# Altium PCB PSC_LED_KEYBOARD.PcbDoc (part 2 of 2)
Units mm, origin at the board's own origin, x right, y up, seen from the top; angles counter-clockwise.
Board outline 100 x 100 mm, 2 copper layers (Top Layer, Bottom Layer); 100 components, 28 nets, 284 pads, 1428 vias.
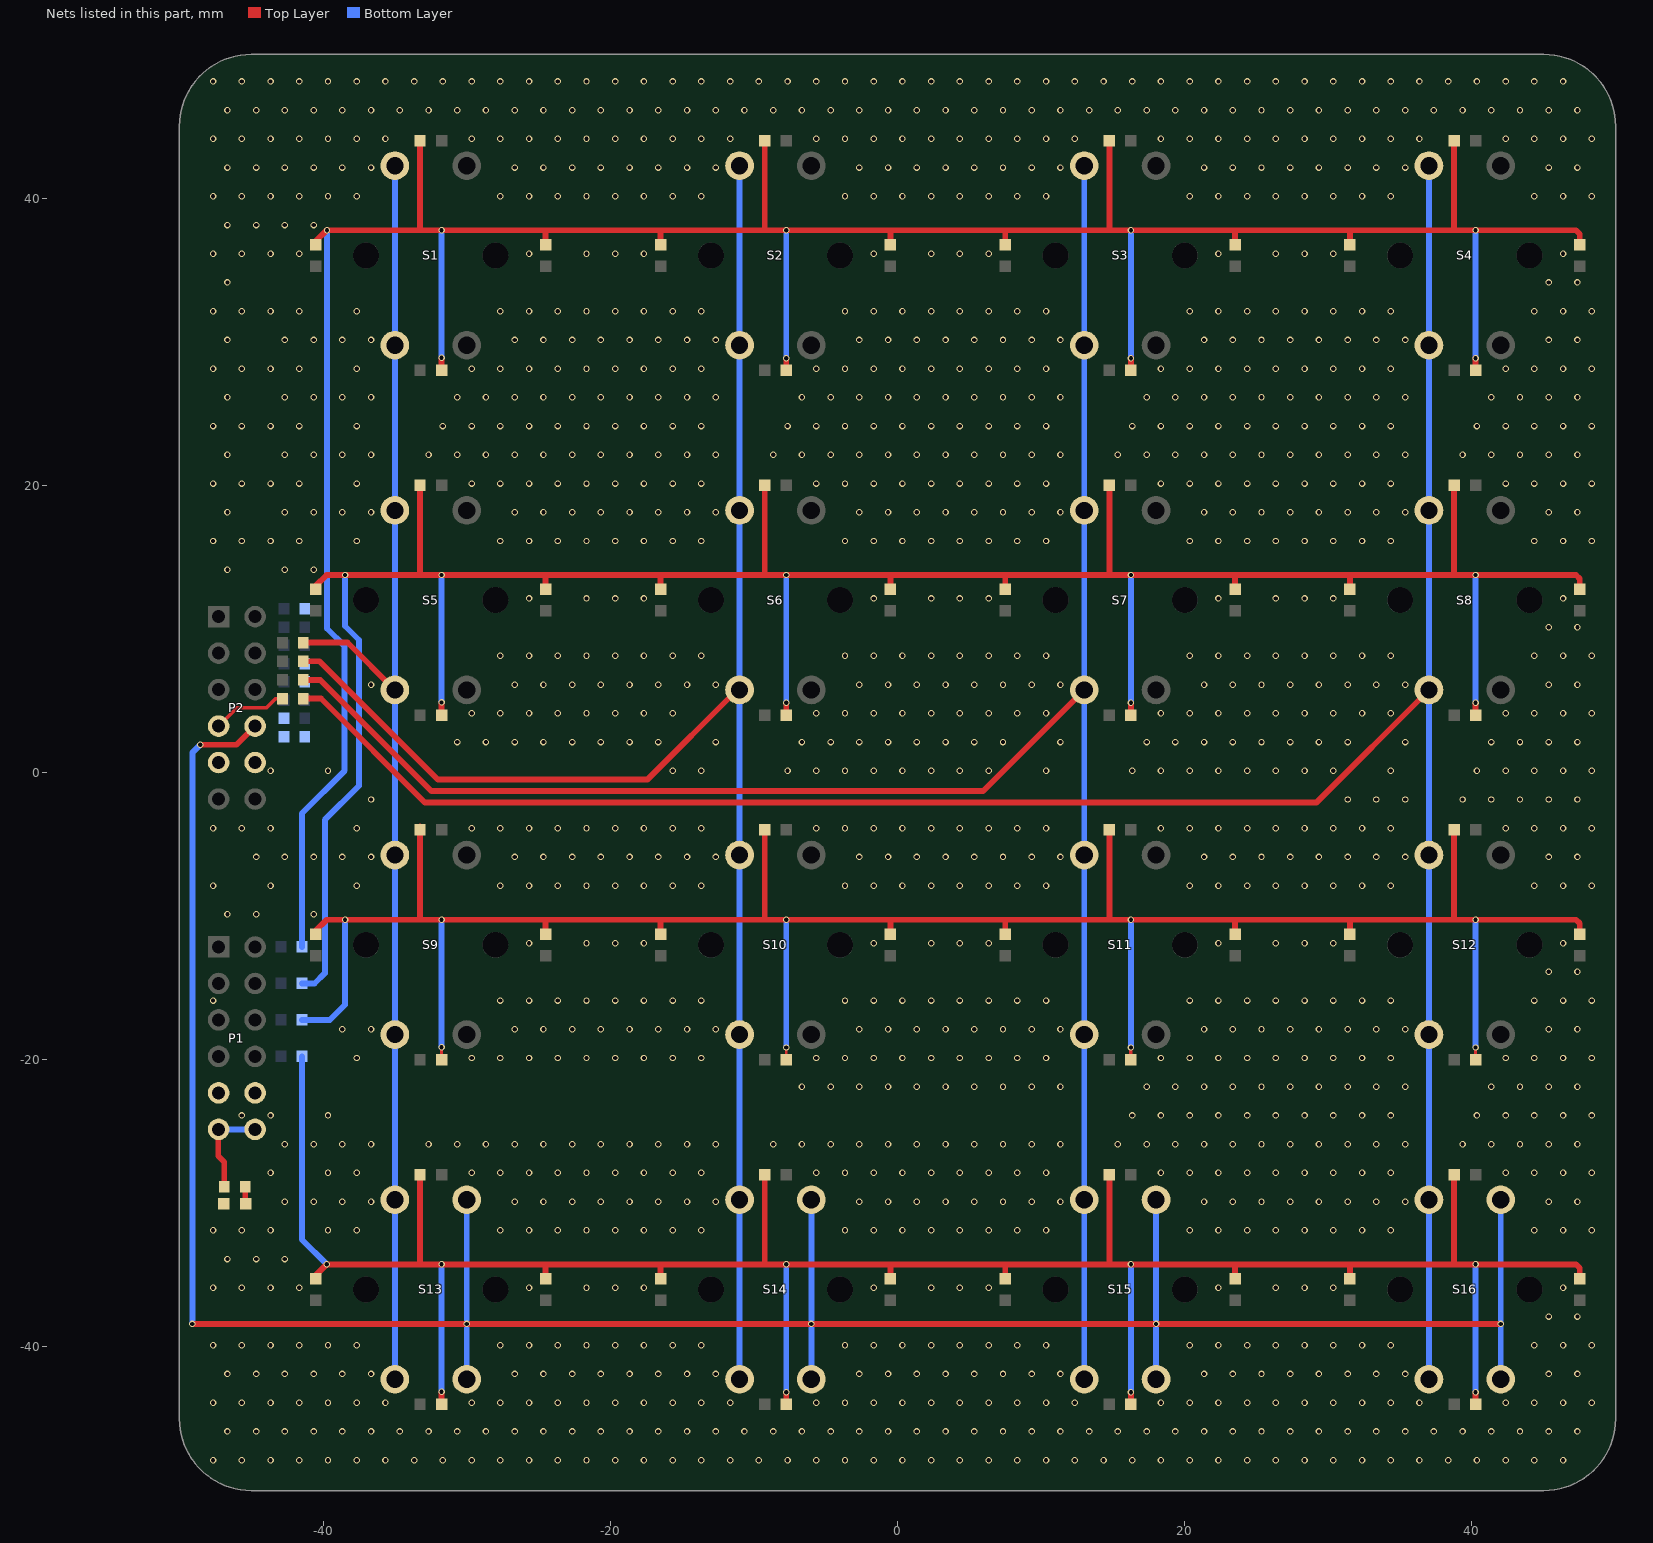
[diagram p2: the nets of this part, all layers, seen from the top]

## Via types
v1: diameter 0.45, hole 0.3, Top Layer to Bottom Layer, tented both sides, 1428 vias

## Nets (pads, with @x,y where several pads share a name; then routed paths per layer and width w, separated by ;. In a path a pad name is that pad's centre, name@x,y a point inside that pad or via, vN(x,y) a via of type N, cw(c..) or ccw(c..) an arc to the next point about the centre after c; other vN are vias at no path point) (continued)
GND: D5.1 P1.9 P1.10 P2.9 P2.10 R13.1 R14.1 R15.1 R16.1
  other v1: -47.657,-47.882 -45.657,-47.882 -43.657,-47.882 -41.657,-47.882 -39.657,-47.882 -37.657,-47.882 -35.657,-47.882 -33.657,-47.882 -31.657,-47.882 -29.657,-47.882 -27.657,-47.882 -25.657,-47.882 -23.657,-47.882 -21.657,-47.882 -19.657,-47.882 -17.657,-47.882 -15.657,-47.882 -13.657,-47.882 -11.657,-47.882 -9.657,-47.882 -7.657,-47.882 -5.657,-47.882 -3.657,-47.882 -1.657,-47.882 0.343,-47.882 2.343,-47.882 4.343,-47.882 6.343,-47.882 8.343,-47.882 10.343,-47.882 12.343,-47.882 14.343,-47.882 16.343,-47.882 18.343,-47.882 20.343,-47.882 22.343,-47.882 24.343,-47.882 26.343,-47.882 28.343,-47.882 30.343,-47.882 32.343,-47.882 34.343,-47.882 36.343,-47.882 38.343,-47.882 40.343,-47.882 42.343,-47.882 44.343,-47.882 46.343,-47.882 -46.657,-45.882 -44.657,-45.882 -42.657,-45.882 -40.657,-45.882 -38.657,-45.882 -36.657,-45.882 -34.657,-45.882 -32.657,-45.882 -30.657,-45.882 -28.657,-45.882 -26.657,-45.882 -24.657,-45.882 -22.657,-45.882 -20.657,-45.882 -18.657,-45.882 -16.657,-45.882 -14.657,-45.882 -12.657,-45.882 -10.657,-45.882 -8.657,-45.882 -6.657,-45.882 -4.657,-45.882 -2.657,-45.882 -0.657,-45.882 1.343,-45.882 3.343,-45.882 5.343,-45.882 7.343,-45.882 9.343,-45.882 11.343,-45.882 13.343,-45.882 15.343,-45.882 17.343,-45.882 19.343,-45.882 21.343,-45.882 23.343,-45.882 25.343,-45.882 27.343,-45.882 29.343,-45.882 31.343,-45.882 33.343,-45.882 35.343,-45.882 37.343,-45.882 39.343,-45.882 41.343,-45.882 43.343,-45.882 45.343,-45.882 47.343,-45.882 -47.657,-43.882 -45.657,-43.882 -43.657,-43.882 -41.657,-43.882 -39.657,-43.882 -37.657,-43.882 -35.657,-43.882 -29.657,-43.882 -27.657,-43.882 -25.657,-43.882 -23.657,-43.882 -21.657,-43.882 -19.657,-43.882 -17.657,-43.882 -15.657,-43.882 -13.657,-43.882 -11.657,-43.882 -5.657,-43.882 -3.657,-43.882 -1.657,-43.882 0.343,-43.882 2.343,-43.882 4.343,-43.882 6.343,-43.882 8.343,-43.882 10.343,-43.882 12.343,-43.882 18.343,-43.882 20.343,-43.882 22.343,-43.882 24.343,-43.882 26.343,-43.882 28.343,-43.882 30.343,-43.882 32.343,-43.882 34.343,-43.882 36.343,-43.882 42.343,-43.882 44.343,-43.882 46.343,-43.882 48.343,-43.882 -46.657,-41.882 -44.657,-41.882 -42.657,-41.882 -40.657,-41.882 -38.657,-41.882 -36.657,-41.882 -26.657,-41.882 -24.657,-41.882 -22.657,-41.882 -20.657,-41.882 -18.657,-41.882 -16.657,-41.882 -14.657,-41.882 -12.657,-41.882 -2.657,-41.882 -0.657,-41.882 1.343,-41.882 3.343,-41.882 5.343,-41.882 7.343,-41.882 9.343,-41.882 11.343,-41.882 21.343,-41.882 23.343,-41.882 25.343,-41.882 27.343,-41.882 29.343,-41.882 31.343,-41.882 33.343,-41.882 35.343,-41.882 45.343,-41.882 47.343,-41.882 -47.657,-39.882 -45.657,-39.882 -43.657,-39.882 -41.657,-39.882 -39.657,-39.882 -37.657,-39.882 -27.657,-39.882 -25.657,-39.882 -23.657,-39.882 -21.657,-39.882 -19.657,-39.882 -17.657,-39.882 -15.657,-39.882 -13.657,-39.882 -3.657,-39.882 -1.657,-39.882 0.343,-39.882 2.343,-39.882 4.343,-39.882 6.343,-39.882 8.343,-39.882 10.343,-39.882 20.343,-39.882 22.343,-39.882 24.343,-39.882 26.343,-39.882 28.343,-39.882 30.343,-39.882 32.343,-39.882 34.343,-39.882 44.343,-39.882 46.343,-39.882 48.343,-39.882 45.343,-37.882 47.343,-37.882 -47.657,-35.882 -45.657,-35.882 -43.657,-35.882 -41.657,-35.882 -25.657,-35.882 -21.657,-35.882 -19.657,-35.882 -17.657,-35.882 -1.657,-35.882 2.343,-35.882 4.343,-35.882 6.343,-35.882 22.343,-35.882 26.343,-35.882 28.343,-35.882 30.343,-35.882 46.343,-35.882 -46.657,-33.882 -44.657,-33.882 -42.657,-33.882 -47.657,-31.882 -45.657,-31.882 -43.657,-31.882 -39.657,-31.882 -37.657,-31.882 -27.657,-31.882 -25.657,-31.882 -23.657,-31.882 -21.657,-31.882 -19.657,-31.882 -17.657,-31.882 -15.657,-31.882 -13.657,-31.882 -3.657,-31.882 -1.657,-31.882 0.343,-31.882 2.343,-31.882 4.343,-31.882 6.343,-31.882 8.343,-31.882 10.343,-31.882 20.343,-31.882 22.343,-31.882 24.343,-31.882 26.343,-31.882 28.343,-31.882 30.343,-31.882 32.343,-31.882 34.343,-31.882 44.343,-31.882 46.343,-31.882 48.343,-31.882 -42.657,-29.882 -40.657,-29.882 -38.657,-29.882 -36.657,-29.882 -26.657,-29.882 -24.657,-29.882 -22.657,-29.882 -20.657,-29.882 -18.657,-29.882 -16.657,-29.882 -14.657,-29.882 -12.657,-29.882 -2.657,-29.882 -0.657,-29.882 1.343,-29.882 3.343,-29.882 5.343,-29.882 7.343,-29.882 9.343,-29.882 11.343,-29.882 21.343,-29.882 23.343,-29.882 25.343,-29.882 27.343,-29.882 29.343,-29.882 31.343,-29.882 33.343,-29.882 35.343,-29.882 45.343,-29.882 47.343,-29.882 -43.657,-27.882 -39.657,-27.882 -37.657,-27.882 -29.657,-27.882 -27.657,-27.882 -25.657,-27.882 -23.657,-27.882 -21.657,-27.882 -19.657,-27.882 -17.657,-27.882 -15.657,-27.882 -13.657,-27.882 -5.657,-27.882 -3.657,-27.882 -1.657,-27.882 0.343,-27.882 2.343,-27.882 4.343,-27.882 6.343,-27.882 8.343,-27.882 10.343,-27.882 18.343,-27.882 20.343,-27.882 22.343,-27.882 24.343,-27.882 26.343,-27.882 28.343,-27.882 30.343,-27.882 32.343,-27.882 34.343,-27.882 42.343,-27.882 44.343,-27.882 46.343,-27.882 48.343,-27.882 -42.657,-25.882 -40.657,-25.882 -38.657,-25.882 -36.657,-25.882 -32.657,-25.882 -30.657,-25.882 -28.657,-25.882 -26.657,-25.882 -24.657,-25.882 -22.657,-25.882 -20.657,-25.882 -18.657,-25.882 -16.657,-25.882 -14.657,-25.882 -12.657,-25.882 -8.657,-25.882 -6.657,-25.882 -4.657,-25.882 -2.657,-25.882 -0.657,-25.882 1.343,-25.882 3.343,-25.882 5.343,-25.882 7.343,-25.882 9.343,-25.882 11.343,-25.882 15.343,-25.882 17.343,-25.882 19.343,-25.882 21.343,-25.882 23.343,-25.882 25.343,-25.882 27.343,-25.882 29.343,-25.882 31.343,-25.882 33.343,-25.882 35.343,-25.882 39.343,-25.882 41.343,-25.882 43.343,-25.882 45.343,-25.882 47.343,-25.882 -45.657,-23.882 -43.657,-23.882 -39.657,-23.882 16.343,-23.882 18.343,-23.882 20.343,-23.882 22.343,-23.882 24.343,-23.882 26.343,-23.882 28.343,-23.882 30.343,-23.882 32.343,-23.882 34.343,-23.882 40.343,-23.882 42.343,-23.882 44.343,-23.882 46.343,-23.882 48.343,-23.882 -6.657,-21.882 -4.657,-21.882 -2.657,-21.882 -0.657,-21.882 1.343,-21.882 3.343,-21.882 5.343,-21.882 7.343,-21.882 9.343,-21.882 11.343,-21.882 17.343,-21.882 19.343,-21.882 21.343,-21.882 23.343,-21.882 25.343,-21.882 27.343,-21.882 29.343,-21.882 31.343,-21.882 33.343,-21.882 35.343,-21.882 41.343,-21.882 43.343,-21.882 45.343,-21.882 47.343,-21.882 -37.657,-19.882 -29.657,-19.882 -27.657,-19.882 -25.657,-19.882 -23.657,-19.882 -21.657,-19.882 -19.657,-19.882 -17.657,-19.882 -15.657,-19.882 -13.657,-19.882 -5.657,-19.882 -3.657,-19.882 -1.657,-19.882 0.343,-19.882 2.343,-19.882 4.343,-19.882 6.343,-19.882 8.343,-19.882 10.343,-19.882 18.343,-19.882 20.343,-19.882 22.343,-19.882 24.343,-19.882 26.343,-19.882 28.343,-19.882 30.343,-19.882 32.343,-19.882 34.343,-19.882 42.343,-19.882 44.343,-19.882 46.343,-19.882 48.343,-19.882 -38.657,-17.882 -36.657,-17.882 -26.657,-17.882 -24.657,-17.882 -22.657,-17.882 -20.657,-17.882 -18.657,-17.882 -16.657,-17.882 -14.657,-17.882 -12.657,-17.882 -2.657,-17.882 -0.657,-17.882 1.343,-17.882 3.343,-17.882 5.343,-17.882 7.343,-17.882 9.343,-17.882 11.343,-17.882 21.343,-17.882 23.343,-17.882 25.343,-17.882 27.343,-17.882 29.343,-17.882 31.343,-17.882 33.343,-17.882 35.343,-17.882 45.343,-17.882 47.343,-17.882 -47.657,-15.882 -27.657,-15.882 -25.657,-15.882 -23.657,-15.882 -21.657,-15.882 -19.657,-15.882 -17.657,-15.882 -15.657,-15.882 -13.657,-15.882 -3.657,-15.882 -1.657,-15.882 0.343,-15.882 2.343,-15.882 4.343,-15.882 6.343,-15.882 8.343,-15.882 10.343,-15.882 20.343,-15.882 22.343,-15.882 24.343,-15.882 26.343,-15.882 28.343,-15.882 30.343,-15.882 32.343,-15.882 34.343,-15.882 44.343,-15.882 46.343,-15.882 48.343,-15.882 45.343,-13.882 47.343,-13.882 -25.657,-11.882 -21.657,-11.882 -19.657,-11.882 -17.657,-11.882 -1.657,-11.882 2.343,-11.882 4.343,-11.882 6.343,-11.882 22.343,-11.882 26.343,-11.882 28.343,-11.882 30.343,-11.882 46.343,-11.882 -46.657,-9.882 -44.657,-9.882 -40.657,-9.882 -47.657,-7.882 -43.657,-7.882 -37.657,-7.882 -27.657,-7.882 -25.657,-7.882 -23.657,-7.882 -21.657,-7.882 -19.657,-7.882 -17.657,-7.882 -15.657,-7.882 -13.657,-7.882 -3.657,-7.882 -1.657,-7.882 0.343,-7.882 2.343,-7.882 4.343,-7.882 6.343,-7.882 8.343,-7.882 10.343,-7.882 20.343,-7.882 22.343,-7.882 24.343,-7.882 26.343,-7.882 28.343,-7.882 30.343,-7.882 32.343,-7.882 34.343,-7.882 44.343,-7.882 46.343,-7.882 48.343,-7.882 -44.657,-5.882 -42.657,-5.882 -40.657,-5.882 -38.657,-5.882 -36.657,-5.882 -26.657,-5.882 -24.657,-5.882 -22.657,-5.882 -20.657,-5.882 -18.657,-5.882 -16.657,-5.882 -14.657,-5.882 -12.657,-5.882 -2.657,-5.882 -0.657,-5.882 1.343,-5.882 3.343,-5.882 5.343,-5.882 7.343,-5.882 9.343,-5.882 11.343,-5.882 21.343,-5.882 23.343,-5.882 25.343,-5.882 27.343,-5.882 29.343,-5.882 31.343,-5.882 33.343,-5.882 35.343,-5.882 45.343,-5.882 47.343,-5.882 -47.657,-3.882 -45.657,-3.882 -43.657,-3.882 -37.657,-3.882 -29.657,-3.882 -27.657,-3.882 -25.657,-3.882 -23.657,-3.882 -21.657,-3.882 -19.657,-3.882 -17.657,-3.882 -15.657,-3.882 -13.657,-3.882 -5.657,-3.882 -3.657,-3.882 -1.657,-3.882 0.343,-3.882 2.343,-3.882 4.343,-3.882 6.343,-3.882 8.343,-3.882 10.343,-3.882 18.343,-3.882 20.343,-3.882 22.343,-3.882 24.343,-3.882 26.343,-3.882 28.343,-3.882 30.343,-3.882 32.343,-3.882 34.343,-3.882 42.343,-3.882 44.343,-3.882 46.343,-3.882 48.343,-3.882 -36.657,-1.882 31.343,-1.882 33.343,-1.882 35.343,-1.882 39.343,-1.882 41.343,-1.882 43.343,-1.882 45.343,-1.882 47.343,-1.882 -43.657,0.118 -39.657,0.118 -15.657,0.118 -13.657,0.118 -7.657,0.118 -5.657,0.118 -3.657,0.118 -1.657,0.118 0.343,0.118 2.343,0.118 4.343,0.118 6.343,0.118 10.343,0.118 16.343,0.118 18.343,0.118 20.343,0.118 22.343,0.118 24.343,0.118 26.343,0.118 28.343,0.118 30.343,0.118 34.343,0.118 40.343,0.118 42.343,0.118 44.343,0.118 46.343,0.118 48.343,0.118 -30.657,2.118 -28.657,2.118 -26.657,2.118 -24.657,2.118 -22.657,2.118 -20.657,2.118 -18.657,2.118 -16.657,2.118 -12.657,2.118 -6.657,2.118 -4.657,2.118 -2.657,2.118 -0.657,2.118 1.343,2.118 3.343,2.118 5.343,2.118 7.343,2.118 11.343,2.118 17.343,2.118 19.343,2.118 21.343,2.118 23.343,2.118 25.343,2.118 27.343,2.118 29.343,2.118 31.343,2.118 35.343,2.118 41.343,2.118 43.343,2.118 45.343,2.118 47.343,2.118 -29.657,4.118 -27.657,4.118 -25.657,4.118 -23.657,4.118 -21.657,4.118 -19.657,4.118 -17.657,4.118 -15.657,4.118 -5.657,4.118 -3.657,4.118 -1.657,4.118 0.343,4.118 2.343,4.118 4.343,4.118 6.343,4.118 8.343,4.118 10.343,4.118 18.343,4.118 20.343,4.118 22.343,4.118 24.343,4.118 26.343,4.118 28.343,4.118 30.343,4.118 32.343,4.118 34.343,4.118 42.343,4.118 44.343,4.118 46.343,4.118 48.343,4.118 -36.657,6.118 -26.657,6.118 -24.657,6.118 -22.657,6.118 -20.657,6.118 -18.657,6.118 -16.657,6.118 -14.657,6.118 -12.657,6.118 -2.657,6.118 -0.657,6.118 1.343,6.118 3.343,6.118 5.343,6.118 7.343,6.118 9.343,6.118 11.343,6.118 21.343,6.118 23.343,6.118 25.343,6.118 27.343,6.118 29.343,6.118 31.343,6.118 33.343,6.118 35.343,6.118 45.343,6.118 47.343,6.118 -27.657,8.118 -25.657,8.118 -23.657,8.118 -21.657,8.118 -19.657,8.118 -17.657,8.118 -15.657,8.118 -13.657,8.118 -3.657,8.118 -1.657,8.118 0.343,8.118 2.343,8.118 4.343,8.118 6.343,8.118 8.343,8.118 10.343,8.118 20.343,8.118 22.343,8.118 24.343,8.118 26.343,8.118 28.343,8.118 30.343,8.118 32.343,8.118 34.343,8.118 44.343,8.118 46.343,8.118 48.343,8.118 45.343,10.118 47.343,10.118 -25.657,12.118 -21.657,12.118 -19.657,12.118 -17.657,12.118 -1.657,12.118 2.343,12.118 4.343,12.118 6.343,12.118 22.343,12.118 26.343,12.118 28.343,12.118 30.343,12.118 46.343,12.118 -46.657,14.118 -42.657,14.118 -40.657,14.118 -47.657,16.118 -45.657,16.118 -43.657,16.118 -41.657,16.118 -37.657,16.118 -27.657,16.118 -25.657,16.118 -23.657,16.118 -21.657,16.118 -19.657,16.118 -17.657,16.118 -15.657,16.118 -13.657,16.118 -3.657,16.118 -1.657,16.118 0.343,16.118 2.343,16.118 4.343,16.118 6.343,16.118 8.343,16.118 10.343,16.118 20.343,16.118 22.343,16.118 24.343,16.118 26.343,16.118 28.343,16.118 30.343,16.118 32.343,16.118 34.343,16.118 44.343,16.118 46.343,16.118 48.343,16.118 -46.657,18.118 -42.657,18.118 -40.657,18.118 -38.657,18.118 -36.657,18.118 -26.657,18.118 -24.657,18.118 -22.657,18.118 -20.657,18.118 -18.657,18.118 -16.657,18.118 -14.657,18.118 -12.657,18.118 -2.657,18.118 -0.657,18.118 1.343,18.118 3.343,18.118 5.343,18.118 7.343,18.118 9.343,18.118 11.343,18.118 21.343,18.118 23.343,18.118 25.343,18.118 27.343,18.118 29.343,18.118 31.343,18.118 33.343,18.118 35.343,18.118 45.343,18.118 47.343,18.118 -47.657,20.118 -45.657,20.118 -43.657,20.118 -41.657,20.118 -37.657,20.118 -29.657,20.118 -27.657,20.118 -25.657,20.118 -23.657,20.118 -21.657,20.118 -19.657,20.118 -17.657,20.118 -15.657,20.118 -13.657,20.118 -5.657,20.118 -3.657,20.118 -1.657,20.118 0.343,20.118 2.343,20.118 4.343,20.118 6.343,20.118 8.343,20.118 10.343,20.118 18.343,20.118 20.343,20.118 22.343,20.118 24.343,20.118 26.343,20.118 28.343,20.118 30.343,20.118 32.343,20.118 34.343,20.118 42.343,20.118 44.343,20.118 46.343,20.118 48.343,20.118 -46.657,22.118 -42.657,22.118 -40.657,22.118 -38.657,22.118 -36.657,22.118 -32.657,22.118 -30.657,22.118 -28.657,22.118 -26.657,22.118 -24.657,22.118 -22.657,22.118 -20.657,22.118 -18.657,22.118 -16.657,22.118 -14.657,22.118 -12.657,22.118 -8.657,22.118 -6.657,22.118 -4.657,22.118 -2.657,22.118 -0.657,22.118 1.343,22.118 3.343,22.118 5.343,22.118 7.343,22.118 9.343,22.118 11.343,22.118 15.343,22.118 17.343,22.118 19.343,22.118 21.343,22.118 23.343,22.118 25.343,22.118 27.343,22.118 29.343,22.118 31.343,22.118 33.343,22.118 35.343,22.118 39.343,22.118 41.343,22.118 43.343,22.118 45.343,22.118 47.343,22.118 -47.657,24.118 -45.657,24.118 -43.657,24.118 -41.657,24.118 -37.657,24.118 -31.657,24.118 -29.657,24.118 -27.657,24.118 -25.657,24.118 -23.657,24.118 -21.657,24.118 -19.657,24.118 -17.657,24.118 -15.657,24.118 -13.657,24.118 -7.657,24.118 -5.657,24.118 -3.657,24.118 -1.657,24.118 0.343,24.118 2.343,24.118 4.343,24.118 6.343,24.118 8.343,24.118 10.343,24.118 16.343,24.118 18.343,24.118 20.343,24.118 22.343,24.118 24.343,24.118 26.343,24.118 28.343,24.118 30.343,24.118 32.343,24.118 34.343,24.118 40.343,24.118 42.343,24.118 44.343,24.118 46.343,24.118 48.343,24.118 -46.657,26.118 -42.657,26.118 -40.657,26.118 -38.657,26.118 -36.657,26.118 -30.657,26.118 -28.657,26.118 -26.657,26.118 -24.657,26.118 -22.657,26.118 -20.657,26.118 -18.657,26.118 -16.657,26.118 -14.657,26.118 -12.657,26.118 -6.657,26.118 -4.657,26.118 -2.657,26.118 -0.657,26.118 1.343,26.118 3.343,26.118 5.343,26.118 7.343,26.118 9.343,26.118 11.343,26.118 17.343,26.118 19.343,26.118 21.343,26.118 23.343,26.118 25.343,26.118 27.343,26.118 29.343,26.118 31.343,26.118 33.343,26.118 35.343,26.118 41.343,26.118 43.343,26.118 45.343,26.118 47.343,26.118 -47.657,28.118 -45.657,28.118 -43.657,28.118 -41.657,28.118 -37.657,28.118 -29.657,28.118 -27.657,28.118 -25.657,28.118 -23.657,28.118 -21.657,28.118 -19.657,28.118 -17.657,28.118 -15.657,28.118 -13.657,28.118 -5.657,28.118 -3.657,28.118 -1.657,28.118 0.343,28.118 2.343,28.118 4.343,28.118 6.343,28.118 8.343,28.118 10.343,28.118 18.343,28.118 20.343,28.118 22.343,28.118 24.343,28.118 26.343,28.118 28.343,28.118 30.343,28.118 32.343,28.118 34.343,28.118 42.343,28.118 44.343,28.118 46.343,28.118 48.343,28.118 -46.657,30.118 -42.657,30.118 -40.657,30.118 -38.657,30.118 -36.657,30.118 -26.657,30.118 -24.657,30.118 -22.657,30.118 -20.657,30.118 -18.657,30.118 -16.657,30.118 -14.657,30.118 -12.657,30.118 -2.657,30.118 -0.657,30.118 1.343,30.118 3.343,30.118 5.343,30.118 7.343,30.118 9.343,30.118 11.343,30.118 21.343,30.118 23.343,30.118 25.343,30.118 27.343,30.118 29.343,30.118 31.343,30.118 33.343,30.118 35.343,30.118 45.343,30.118 47.343,30.118 -47.657,32.118 -45.657,32.118 -43.657,32.118 -41.657,32.118 -37.657,32.118 -27.657,32.118 -25.657,32.118 -23.657,32.118 -21.657,32.118 -19.657,32.118 -17.657,32.118 -15.657,32.118 -13.657,32.118 -3.657,32.118 -1.657,32.118 0.343,32.118 2.343,32.118 4.343,32.118 6.343,32.118 8.343,32.118 10.343,32.118 20.343,32.118 22.343,32.118 24.343,32.118 26.343,32.118 28.343,32.118 30.343,32.118 32.343,32.118 34.343,32.118 44.343,32.118 46.343,32.118 48.343,32.118 -46.657,34.118 45.343,34.118 47.343,34.118 -47.657,36.118 -45.657,36.118 -43.657,36.118 -41.657,36.118 -25.657,36.118 -21.657,36.118 -19.657,36.118 -17.657,36.118 -1.657,36.118 2.343,36.118 4.343,36.118 6.343,36.118 22.343,36.118 26.343,36.118 28.343,36.118 30.343,36.118 46.343,36.118 -46.657,38.118 -44.657,38.118 -42.657,38.118 -40.657,38.118 -47.657,40.118 -45.657,40.118 -43.657,40.118 -41.657,40.118 -39.657,40.118 -37.657,40.118 -27.657,40.118 -25.657,40.118 -23.657,40.118 -21.657,40.118 -19.657,40.118 -17.657,40.118 -15.657,40.118 -13.657,40.118 -3.657,40.118 -1.657,40.118 0.343,40.118 2.343,40.118 4.343,40.118 6.343,40.118 8.343,40.118 10.343,40.118 20.343,40.118 22.343,40.118 24.343,40.118 26.343,40.118 28.343,40.118 30.343,40.118 32.343,40.118 34.343,40.118 44.343,40.118 46.343,40.118 48.343,40.118 -46.657,42.118 -44.657,42.118 -42.657,42.118 -40.657,42.118 -38.657,42.118 -36.657,42.118 -26.657,42.118 -24.657,42.118 -22.657,42.118 -20.657,42.118 -18.657,42.118 -16.657,42.118 -14.657,42.118 -12.657,42.118 -2.657,42.118 -0.657,42.118 1.343,42.118 3.343,42.118 5.343,42.118 7.343,42.118 9.343,42.118 11.343,42.118 21.343,42.118 23.343,42.118 25.343,42.118 27.343,42.118 29.343,42.118 31.343,42.118 33.343,42.118 35.343,42.118 45.343,42.118 47.343,42.118 -47.657,44.118 -45.657,44.118 -43.657,44.118 -41.657,44.118 -39.657,44.118 -37.657,44.118 -35.657,44.118 -29.657,44.118 -27.657,44.118 -25.657,44.118 -23.657,44.118 -21.657,44.118 -19.657,44.118 -17.657,44.118 -15.657,44.118 -13.657,44.118 -11.657,44.118 -5.657,44.118 -3.657,44.118 -1.657,44.118 0.343,44.118 2.343,44.118 4.343,44.118 6.343,44.118 8.343,44.118 10.343,44.118 12.343,44.118 18.343,44.118 20.343,44.118 22.343,44.118 24.343,44.118 26.343,44.118 28.343,44.118 30.343,44.118 32.343,44.118 34.343,44.118 36.343,44.118 42.343,44.118 44.343,44.118 46.343,44.118 48.343,44.118 -46.657,46.118 -44.657,46.118 -42.657,46.118 -40.657,46.118 -38.657,46.118 -36.657,46.118 -34.657,46.118 -32.657,46.118 -30.657,46.118 -28.657,46.118 -26.657,46.118 -24.657,46.118 -22.657,46.118 -20.657,46.118 -18.657,46.118 -16.657,46.118 -14.657,46.118 -12.657,46.118 -10.657,46.118 -8.657,46.118 -6.657,46.118 -4.657,46.118 -2.657,46.118 -0.657,46.118 1.343,46.118 3.343,46.118 5.343,46.118 7.343,46.118 9.343,46.118 11.343,46.118 13.343,46.118 15.343,46.118 17.343,46.118 19.343,46.118 21.343,46.118 23.343,46.118 25.343,46.118 27.343,46.118 29.343,46.118 31.343,46.118 33.343,46.118 35.343,46.118 37.343,46.118 39.343,46.118 41.343,46.118 43.343,46.118 45.343,46.118 47.343,46.118 -47.657,48.118 -45.657,48.118 -43.657,48.118 -41.657,48.118 -39.657,48.118 -37.657,48.118 -35.657,48.118 -33.657,48.118 -31.657,48.118 -29.657,48.118 -27.657,48.118 -25.657,48.118 -23.657,48.118 -21.657,48.118 -19.657,48.118 -17.657,48.118 -15.657,48.118 -13.657,48.118 -11.657,48.118 -9.657,48.118 -7.657,48.118 -5.657,48.118 -3.657,48.118 -1.657,48.118 0.343,48.118 2.343,48.118 4.343,48.118 6.343,48.118 8.343,48.118 10.343,48.118 12.343,48.118 14.343,48.118 16.343,48.118 18.343,48.118 20.343,48.118 22.343,48.118 24.343,48.118 26.343,48.118 28.343,48.118 30.343,48.118 32.343,48.118 34.343,48.118 36.343,48.118 38.343,48.118 40.343,48.118 42.343,48.118 44.343,48.118 46.343,48.118
H14: P2.8 R4.1 R16.2 S13.1 S14.1 S15.1 S16.1 | length 186
  Top Layer w0.406: v1(-49.1,-38.4) v1(-6,-38.4) v1(18,-38.4) v1(42,-38.4) ; v1(-48.55,1.925) -46.035,1.925 P2.8@-44.73,3.23
  Bottom Layer w0.406: v1(-49.1,-38.4) -49.1,1.375 v1(-48.55,1.925) ; S13.1@-30,-42.25 v1(-30,-38.4) S13.1@-30,-29.75 ; S14.1@-6,-42.25 S14.1@-6,-29.75 ; S15.1@18,-42.25 S15.1@18,-29.75 ; S16.1@42,-42.25 S16.1@42,-29.75
H16: P2.7 R12.1 | length 5.2
  Top Layer w0.254: P2.7@-47.27,3.23 -46,4.5 -43.943,4.5 -43.3,5.143 R12.1@-42.825,5.143
NetD1_LB1_2: D1_LB1.2 D1_LB2.2 D1_LB3.2 D1_LB4.2 D2_LB1.2 D2_LB2.2 D2_LB3.2 D2_LB4.2 D3_LB1.2 D3_LB2.2 D3_LB3.2 D3_LB4.2 D4_LB1.2 D4_LB2.2 D4_LB3.2 D4_LB4.2 R5.2 | length 209
  Top Layer w0.406: D4_LB1.2@-40.5,37 -39.75,37.75 v1(-39.725,37.75) -33.25,37.75 ; D1_LB1.2@-33.25,44.025 D1_LB1.2@-33.25,44 -33.25,37.75 ; D3_LB1.2@-31.75,28 -31.75,28.85 v1(-31.75,28.875) ; D2_LB1.2@-24.5,37 -24.5,37.75 ; D4_LB2.2@-16.5,37 -16.5,37.75 ; D1_LB2.2@-9.25,44 -9.25,37.75 ; D3_LB2.2@-7.75,28 v1(-7.75,28.85) ; D2_LB2.2@-0.5,37 -0.5,37.75 ; D4_LB3.2@7.5,37 7.5,37.75 ; D1_LB3.2@14.75,44 14.75,37.75 ; D3_LB3.2@16.25,28 v1(16.25,28.85) ; D2_LB3.2@23.5,37 23.5,37.75 ; D4_LB4.2@31.5,37 31.5,37.75 ; D1_LB4.2@38.75,44 38.75,37.75 ; D3_LB4.2@40.25,28 v1(40.25,28.85) ; D2_LB4.2@47.5,37 47.5,37.495 47.245,37.75 v1(40.25,37.75) 38.75,37.75 ; -33.25,37.75 v1(-31.75,37.75) -24.5,37.75 ; -24.5,37.75 -16.5,37.75 ; -16.5,37.75 -9.25,37.75 ; -9.25,37.75 v1(-7.75,37.75) -0.5,37.75 ; -0.5,37.75 7.5,37.75 ; 7.5,37.75 14.75,37.75 ; 14.75,37.75 v1(16.25,37.75) 23.5,37.75 ; 23.5,37.75 31.5,37.75 ; 31.5,37.75 38.75,37.75
  Bottom Layer w0.406: R5.2@-41.475,-12.15 -41.475,-2.85 -38.496,0.129 -38.496,8.796 -39.725,10.025 v1(-39.725,37.75) ; v1(-31.75,28.875) v1(-31.75,37.75) ; v1@-7.75,28.875 v1(-7.75,37.75) ; v1@16.25,28.875 v1(16.25,37.75) ; v1@40.25,28.875 v1(40.25,37.75)
NetD1_LB5_2: D1_LB5.2 D1_LB6.2 D1_LB7.2 D1_LB8.2 D2_LB5.2 D2_LB6.2 D2_LB7.2 D2_LB8.2 D3_LB5.2 D3_LB6.2 D3_LB7.2 D3_LB8.2 D4_LB5.2 D4_LB6.2 D4_LB7.2 D4_LB8.2 R6.2 | length 188.4
  Top Layer w0.406: D4_LB5.2@-40.5,13 -39.75,13.75 v1(-38.469,13.75) -33.25,13.75 ; D1_LB5.2@-33.25,20 -33.25,13.75 ; D3_LB5.2@-31.75,4 -31.75,4.85 v1(-31.75,4.875) ; D2_LB5.2@-24.5,13 -24.5,13.75 ; D4_LB6.2@-16.5,13 -16.5,13.75 ; D1_LB6.2@-9.25,20.025 D1_LB6.2@-9.25,20 -9.25,13.75 ; D3_LB6.2@-7.75,4 v1(-7.75,4.85) ; D2_LB6.2@-0.5,13 -0.5,13.75 ; D4_LB7.2@7.5,13 7.5,13.75 ; D1_LB7.2@14.75,20 14.75,13.75 ; D3_LB7.2@16.25,4 v1(16.25,4.85) ; D2_LB7.2@23.5,13 23.5,13.75 ; D4_LB8.2@31.5,13 31.5,13.75 ; D1_LB8.2@38.75,20 38.75,13.75 ; D3_LB8.2@40.25,4 v1(40.25,4.85) ; D2_LB8.2@47.5,13 47.5,13.495 47.245,13.75 v1(40.25,13.75) 38.75,13.75 ; -33.25,13.75 v1(-31.75,13.75) -24.5,13.75 ; -24.5,13.75 -16.5,13.75 ; -16.5,13.75 -9.25,13.75 ; -9.25,13.75 v1(-7.75,13.75) -0.5,13.75 ; -0.5,13.75 7.5,13.75 ; 7.5,13.75 14.75,13.75 ; 14.75,13.75 v1(16.25,13.75) 23.5,13.75 ; 23.5,13.75 31.5,13.75 ; 31.5,13.75 38.75,13.75
  Bottom Layer w0.406: R6.2@-41.475,-14.69 -40.59,-14.69 -39.875,-13.975 -39.875,-3.3 -37.5,-0.925 -37.5,9.225 -38.469,10.194 v1(-38.469,13.75) ; v1(-31.75,4.875) v1(-31.75,13.75) ; v1@-7.75,4.875 v1(-7.75,13.75) ; v1@16.25,4.875 v1(16.25,13.75) ; v1@40.25,4.875 v1(40.25,13.75)
NetD1_LB9_2: D1_LB9.2 D1_LB10.2 D1_LB11.2 D1_LB12.2 D2_LB9.2 D2_LB10.2 D2_LB11.2 D2_LB12.2 D3_LB9.2 D3_LB10.2 D3_LB11.2 D3_LB12.2 D4_LB9.2 D4_LB10.2 D4_LB11.2 D4_LB12.2 R7.2 | length 167
  Top Layer w0.203: D3_LB9.2@-31.75,-20 -31.75,-19.15 v1(-31.75,-19.125) ; D3_LB10.2@-7.75,-20 v1(-7.75,-19.15) ; D3_LB12.2@40.25,-20 v1(40.25,-19.15)
  Top Layer w0.254: D3_LB11.2@16.25,-20 v1(16.25,-19.15)
  Top Layer w0.406: D4_LB9.2@-40.5,-11 -39.75,-10.25 v1(-38.469,-10.25) -33.25,-10.25 ; D1_LB9.2@-33.25,-3.75 D1_LB9.2@-33.25,-4 -33.25,-10.25 ; D2_LB9.2@-24.5,-11 -24.5,-10.25 ; D4_LB10.2@-16.5,-11 -16.5,-10.25 ; D1_LB10.2@-9.25,-4 -9.25,-10.25 ; D2_LB10.2@-0.5,-11 -0.5,-10.25 ; D4_LB11.2@7.5,-11 7.5,-10.25 ; D1_LB11.2@14.75,-4 14.75,-10.25 ; D2_LB11.2@23.5,-11 23.5,-10.25 ; D4_LB12.2@31.5,-11 31.5,-10.25 ; D1_LB12.2@38.75,-4 38.75,-10.25 ; D2_LB12.2@47.5,-11 47.5,-10.505 47.245,-10.25 v1(40.25,-10.25) 38.75,-10.25 ; -33.25,-10.25 v1(-31.75,-10.25) -24.5,-10.25 ; -24.5,-10.25 -16.5,-10.25 ; -16.5,-10.25 -9.25,-10.25 ; -9.25,-10.25 v1(-7.75,-10.25) -0.5,-10.25 ; -0.5,-10.25 7.5,-10.25 ; 7.5,-10.25 14.75,-10.25 ; 14.75,-10.25 v1(16.25,-10.25) 23.5,-10.25 ; 23.5,-10.25 31.5,-10.25 ; 31.5,-10.25 38.75,-10.25
  Bottom Layer w0.406: R7.2@-41.475,-17.23 -39.53,-17.23 -38.469,-16.169 v1(-38.469,-10.25) ; v1(-31.75,-19.125) v1(-31.75,-10.25) ; v1@-7.75,-19.125 v1(-7.75,-10.25) ; v1@16.25,-19.125 v1(16.25,-10.25) ; v1@40.25,-19.125 v1(40.25,-10.25)
NetD1_LB13_2: D1_LB13.2 D1_LB14.2 D1_LB15.2 D1_LB16.2 D2_LB13.2 D2_LB14.2 D2_LB15.2 D2_LB16.2 D3_LB13.2 D3_LB14.2 D3_LB15.2 D3_LB16.2 D4_LB13.2 D4_LB14.2 D4_LB15.2 D4_LB16.2 R8.2 | length 172.6
  Top Layer w0.406: D4_LB13.2@-40.5,-35 v1(-39.75,-34.25) -33.25,-34.25 ; D1_LB13.2@-33.25,-27.975 D1_LB13.2@-33.25,-28 -33.25,-34.25 ; D3_LB13.2@-31.75,-44 -31.75,-43.15 v1(-31.75,-43.125) ; D2_LB13.2@-24.5,-35 -24.5,-34.25 ; D4_LB14.2@-16.5,-35 -16.5,-34.25 ; -9.25,-34.25 D1_LB14.2@-9.25,-28 D1_LB14.2@-9.25,-27.975 ; D3_LB14.2@-7.75,-44 v1(-7.75,-43.15) ; D2_LB14.2@-0.5,-35 -0.5,-34.25 ; D4_LB15.2@7.5,-35 7.5,-34.25 ; 14.75,-34.25 D1_LB15.2@14.75,-28 ; D3_LB15.2@16.25,-44 v1(16.25,-43.15) ; D2_LB15.2@23.5,-35 23.5,-34.25 ; D4_LB16.2@31.5,-35 31.5,-34.25 ; 38.75,-34.25 D1_LB16.2@38.75,-28 D1_LB16.2@38.75,-27.975 ; D3_LB16.2@40.25,-44 v1(40.25,-43.15) ; D2_LB16.2@47.5,-35 47.5,-34.505 47.245,-34.25 v1(40.25,-34.25) 38.75,-34.25 31.5,-34.25 ; -33.25,-34.25 v1(-31.75,-34.25) -24.5,-34.25 ; -24.5,-34.25 -16.5,-34.25 ; -16.5,-34.25 -9.25,-34.25 v1(-7.75,-34.25) -0.5,-34.25 ; -0.5,-34.25 7.5,-34.25 ; 7.5,-34.25 14.75,-34.25 v1(16.25,-34.25) 23.5,-34.25 ; 23.5,-34.25 31.5,-34.25
  Bottom Layer w0.406: R8.2@-41.475,-19.77 -41.475,-32.525 v1(-39.75,-34.25) ; v1(-31.75,-43.125) v1(-31.75,-34.25) ; v1@-7.75,-43.125 v1(-7.75,-34.25) ; v1@16.25,-43.125 v1(16.25,-34.25) ; v1@40.25,-43.125 v1(40.25,-34.25)
NetD5_2: D5.2 R17.1 | length 1.2
  Top Layer w0.406: R17.1@-45.425,-28.85 -45.412,-28.863 -45.412,-30.013 D5.2@-45.4,-30.025
NetP1_11: P1.11 P1.12 R17.2 | length 6.7
  Top Layer w0.406: P1.11@-47.27,-24.85 -47.3,-24.88 -47.3,-26.7 -46.875,-27.125 R17.2@-46.875,-28.85
  Bottom Layer w0.406: P1.11@-47.27,-24.85 P1.12@-44.73,-24.85
NetR9_2: R9.2 S1.2 S5.2 S9.2 S13.2 | length 92.2
  Top Layer w0.406: R9.2@-41.375,9.043 -38.293,9.043 S5.2@-35,5.75
  Bottom Layer w0.406: S13.2@-35,-42.25 S13.2@-35,-29.75 S9.2@-35,-18.25 S9.2@-35,-5.75 S5.2@-35,5.75 S5.2@-35,18.25 S1.2@-35,29.75 S1.2@-35,42.25
NetR10_2: R10.2 S2.2 S6.2 S10.2 S14.2 | length 120.9
  Top Layer w0.406: R10.2@-41.375,7.743 -40.243,7.743 -32,-0.5 -17.431,-0.5 -11.181,5.75 S6.2@-11,5.75
  Bottom Layer w0.406: S14.2@-11,-42.25 S14.2@-11,-29.75 S10.2@-11,-18.25 S10.2@-11,-5.75 S6.2@-11,5.75 S6.2@-11,18.25 S2.2@-11,29.75 S2.2@-11,42.25
NetR11_2: R11.2 S3.2 S7.2 S11.2 S15.2 | length 145
  Top Layer w0.406: R11.2@-41.375,6.443 -40.193,6.443 -32.45,-1.3 5.95,-1.3 S7.2@13,5.75
  Bottom Layer w0.406: S15.2@13,-42.25 S15.2@13,-29.75 S11.2@13,-18.25 S11.2@13,-5.75 S7.2@13,5.75 S7.2@13,18.25 S3.2@13,29.75 S3.2@13,42.25
NetR12_2: R12.2 S4.2 S8.2 S12.2 S16.2 | length 169.1
  Top Layer w0.406: R12.2@-41.375,5.143 -40.143,5.143 -32.9,-2.1 29.15,-2.1 S8.2@37,5.75
  Bottom Layer w0.406: S16.2@37,-42.25 S16.2@37,-29.75 S12.2@37,-18.25 S12.2@37,-5.75 S8.2@37,5.75 S8.2@37,18.25 S4.2@37,42.25
pads on no net: S1.DNC S2.DNC S3.DNC S4.DNC S5.DNC S6.DNC S7.DNC S8.DNC S9.DNC S10.DNC S11.DNC S12.DNC S13.DNC S14.DNC S15.DNC S16.DNC

## Polygon pours and split planes (outlines as drawn)
GND on Bottom Layer "GND_L02_P005" (solid, pour order 5): 45,49.5 cw(c45,45) 49.5,45 49.5,-45 cw(c45,-45) 45,-49.5 -44.5,-49.5 cw(c-44.5,-44.5) -49.5,-44.5 -49.5,45 cw(c-45,45) -45,49.5
H14 on Bottom Layer "H14_L02_P003" (solid, pour order 3): -45.873,2.653 -45.2,1.98 -42.45,1.98 -42.45,4.38 -45.2,4.38 -45.873,3.707
D14 on Bottom Layer "D14_L02_P000" (solid, pour order 0): -45.873,10.273 -45.2,9.6 -42.4,9.6 -42.4,12 -45.2,12 -45.873,11.327
G16 on Bottom Layer "G16_L02_P002" (solid, pour order 2): -45.873,5.193 -45.2,4.52 -42.425,4.52 -42.425,6.92 -45.2,6.92 -45.873,6.247
F16 on Bottom Layer "F16_L02_P001" (solid, pour order 1): -45.873,7.733 -45.2,7.06 -42.425,7.06 -42.425,9.46 -45.2,9.46 -45.873,8.787
GND on Top Layer "GND_L01_P004" (solid, remove dead copper, pour order 4): 45,49.5 cw(c45,45) 49.5,45 49.5,-45 cw(c45,-45) 45,-49.5 -44.5,-49.5 cw(c-44.5,-44.5) -49.5,-44.5 -49.5,45 cw(c-45,45) -45,49.5

## Other copper
Top Layer:
  pour cut-out: -42.445,9.655 -42.445,4.489 -41.75,4.489 -41.75,9.697 -42.451,9.697

## Silkscreen, mask and mechanical layers (free items; w line width, h text height)
Top Overlay:
  drawing of 18 lines, arcs and shapes, not listed
  text "Matrix 4x4 Keyboard with LEDs" at -17.774,-48.023 h1.27
Bottom Overlay:
  text "Mateusz Gasiorowski | 12.12.2024r. / Dr inz. Pawel Rajda | Rev. 1" at 23.301,-49 h1.27
Mechanical 1:
  the board outline again, w0.254

## Text inside footprints (layer, text, board x,y; h text height)
P1: Top Overlay "1" at -47.905,-10.161 h1.27 r270; Top Overlay "2" at -45.365,-9.949 h1.27 r270; Top Overlay "11" at -47.905,-26.141 h1.27 r270; Top Overlay "12" at -45.365,-25.93 h1.27 r270
P2: Top Overlay "1" at -47.905,12.839 h1.27 r270; Top Overlay "2" at -45.365,13.051 h1.27 r270; Top Overlay "11" at -47.905,-3.141 h1.27 r270; Top Overlay "12" at -45.365,-2.93 h1.27 r270